# Altium PCB HeartRateBand.PcbDoc
Units mm, origin at the board's own origin, x right, y up, seen from the top; angles counter-clockwise.
Board outline 144.57 x 35.13 mm, 2 copper layers (Top Layer, Bottom Layer); 68 components, 44 nets, 278 pads, 108 vias.
Unrouted connection lines stored in the file: 33.
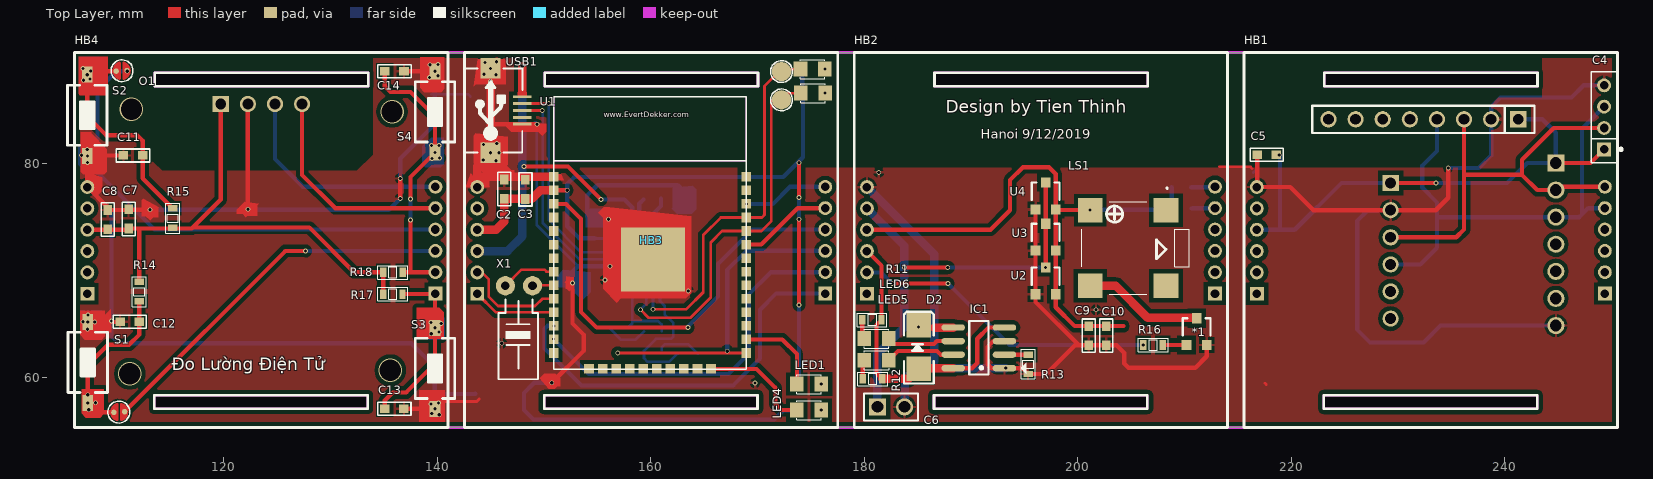
[diagram p0: Top Layer view]
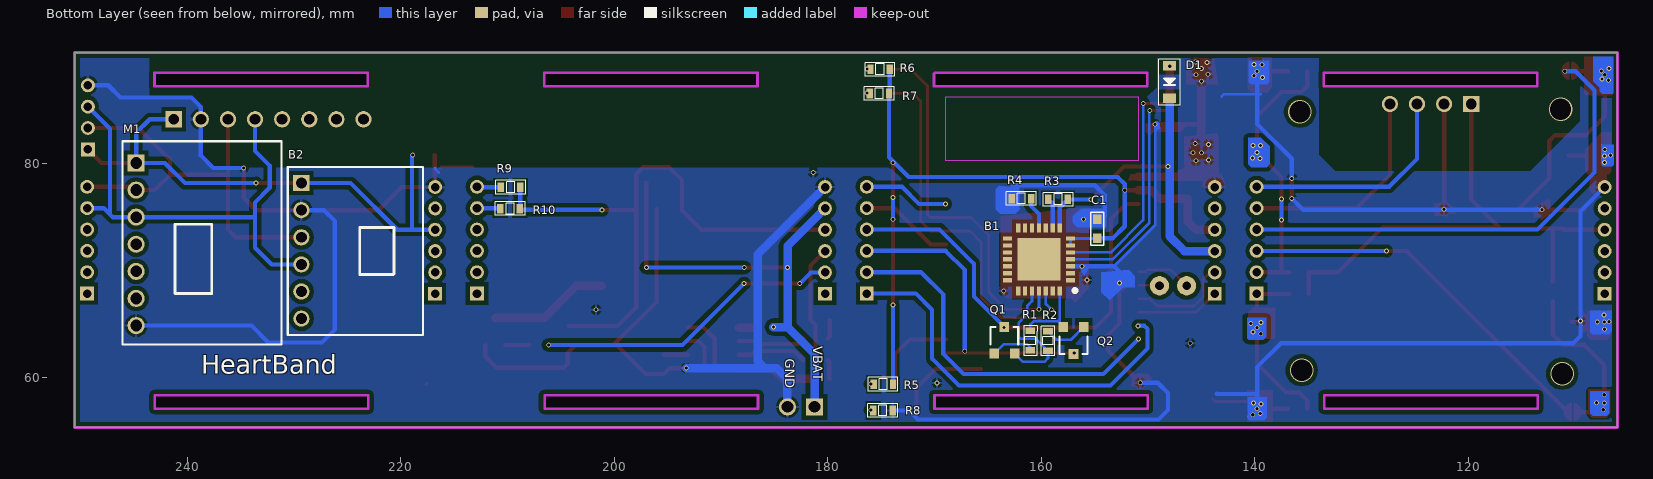
[diagram p1: Bottom Layer view, seen from below]
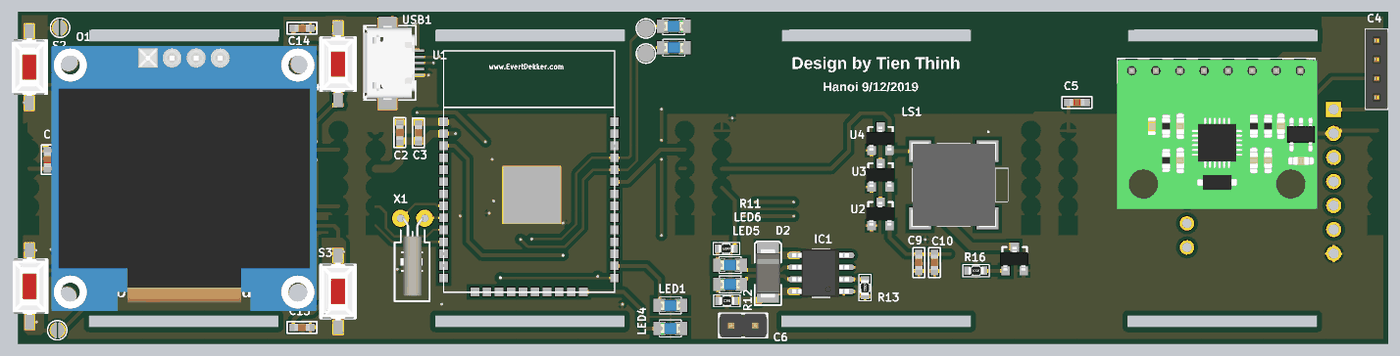
[diagram p2: 3D render of the assembled board from above, using the file's embedded part models]
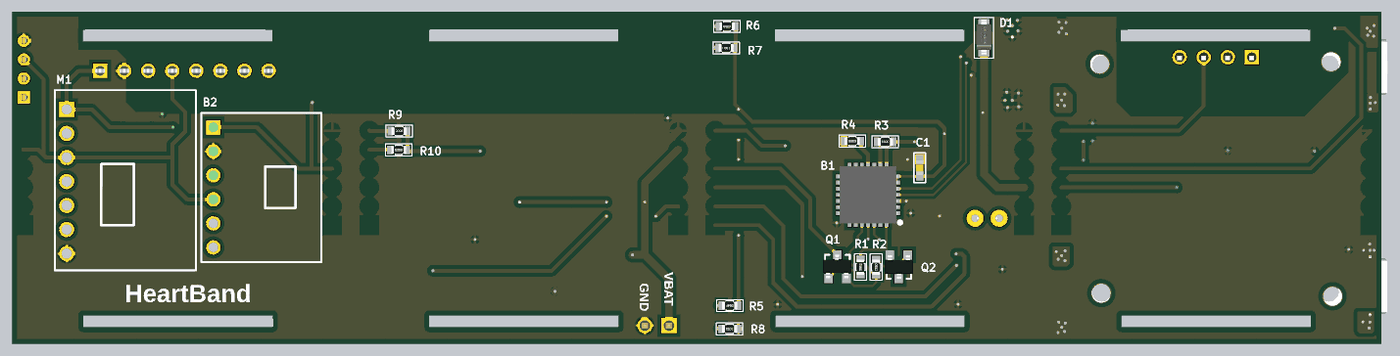
[diagram p3: 3D render of the assembled board from below, using the file's embedded part models]

## Layer stack, top to bottom
Top Solder: solder mask 0.0102, Solder Resist, Dk 3.5
Top Layer: signal copper 0.0356
Dielectric 1: dielectric 0.32, FR-4, Dk 4.8
Bottom Layer: signal copper 0.0356
Bottom Solder: solder mask 0.0102, Solder Resist, Dk 3.5

## Board outline
106.01,55.31 250.56,55.31 250.57,55.32 250.57,90.41 250.54,90.44 106.03,90.44 106,90.41

## Design rules (kind name [scope] priority, off if disabled: settings)
Clearance [All] p1: gap=0.4 ignorepadtopadclearanceinfootprint=FALSE
PolygonConnect [All] p1: connectstyle=Relief reliefconductorwidth=0.254 reliefentries=4 polygonreliefangle="90 Angle" airgapwidth=0.254
RoutingVias [All] p1: holewidth=0.3 width=0.45 viastyle="Through Hole" minholewidth=0.3 minwidth=0.45 maxholewidth=0.3 maxwidth=0.45
SolderMaskExpansion [All] p1: expansion=0.102
Width [All] p1: maxlimit=0.8 minlimit=0.254 preferedwidth=0.4
30 further rules are at their usual default settings.

## Classes and differential pairs
component class HeartRateBand: *1 B1 B2 C1 C2 C3 C4 C5 C6 C7 C8 C9 C10 C11 C12 C13 C14 D1 D2 HB1 HB2 HB4 IC1 LED1 LED4 LED5 LED6 LS1 M1 O1 Q1 Q2 R1 R2 R3 R4 R5 R6 R7 R8 R9 R10 R11 R12 R13 R14 R15 R17 R18 R20 S1 S2 S3 S4 U1 U2 U3 U4 USB1 X1

## Components (designator, comment, footprint, x,y, rotation, side; value= is the part's Value field where it differs from the comment)
*1 "AO3400" SOT23-123 211.14,64.29 r0 top
*TP3 "TP" TP 173.435,87.485 r90 top
*TP4 "TP" TP 173.435,84.835 r90 top
B1 "CP2102N-A01-GQFN28" QFN65P600X600X100-29N-D 160.206,71.066 r0 bottom
B2 "BMP280" BMP280 232.06,63.93 r180 bottom
C1 "104" SM-0603 154.75,73.93 r270 bottom value=103
C2 "104" SM-0603 146.27,77.65 r270 top value=103
C3 "104" SM-0603 148.25,77.62 r270 top value=103
C4 "JP4x1-2.0" J4-C1T 249.32,84.37 r90 top
C5 "104" SM-0603 217.71,80.85 r180 top value=103
C6 "JP2" JP2-D1T 181.23,57.24 r0 top
C7 "106" SM-0603 111.066,74.85 r90 top value=103
C8 "106" SM-0603 109.11,74.79 r90 top value=103
C9 "106" SM-0603 201.04,63.91 r270 top value=103
C10 "106" SM-0603 202.68,63.91 r270 top value=103
C11 "104" SM-0603 111.48,80.8 r0 top value=103
C12 "104" SM-0603 111.17,65.21 r180 top value=103
C13 "104" SM-0603 135.96,57.06 r180 top value=103
C14 "104" SM-0603 135.97,88.69 r180 top value=103
D1 "Diode" DIO-SMD-123 147.97,87.67 r90 bottom
D2 "Diode" DIO-SMD-106 185.11,62.848 r270 top
HB1 "HeartBand" HeartBand 210.45,50.06 r0 top locked
HB2 "HeartBand" HeartBand 173.92,50.06 r0 top locked
HB3 "HeartBand" HeartBand 137.4,50.06 r0 top locked
HB4 "HeartBand" HeartBand 100.87,50.06 r0 top locked
IC1 "TP4056-42-ESOP8" SO-8 190.73,62.77 r180 top
LED1 "LED" SM-LED-0805-Blue 175.97,59.37 r180 top
LED2 "LED" SM-LED-0805-Blue 176.306,88.89 r180 top
LED3 "LED" SM-LED-0805-Blue 176.326,86.64 r180 top
LED4 "LED" SM-LED-0805-Blue 173.684,56.94 r0 top
LED5 "LED" SM-LED-0805-Blue 180,61.61 r0 top
LED6 "LED" SM-LED-0805-Blue 179.99,63.64 r0 top
LS1 "BUZZER MLT-8530" MLT8530 204.72,72.13 r0 top
M1 "Mã SP: 385470" MAX30100 244.8,64.86 r180 bottom
MU1 "MPU6050" MPU6050 235.688,76.695 r180 top locked
O1 "OLED" "OLED I2C MODULE" 120.91,51.128 r0 top locked
Q1 "2N3904" SOT23-231 163.44,63.48 r180 bottom value=C1815
Q2 "2N3904" SOT23-231 156.97,63.46 r0 bottom value=C1815
R1 "12k" RES-SMD-0603 161.01,63.43 r90 bottom
R2 "12k" RES-SMD-0603 159.36,63.42 r270 bottom
R3 "4k7" RES-SMD-0603 158.39,76.68 r0 bottom
R4 "4k7" RES-SMD-0603 161.87,76.76 r180 bottom
R5 "470r" RES-SMD-0603 174.81,59.36 r180 bottom
R6 "470r" RES-SMD-0603 175.1,88.87 r180 bottom
R7 "470r" RES-SMD-0603 175.18,86.6 r180 bottom
R8 "470R" RES-SMD-0603 174.83,56.9 r180 bottom
R9 "10k" RES-SMD-0603 209.71,77.82 r0 bottom
R10 "10k" RES-SMD-0603 209.75,75.82 r0 bottom
R11 "10k" RES-SMD-0603 180.727,65.39 r180 top
R12 "10k" RES-SMD-0603 180.79,59.86 r180 top
R13 "1k2" RES-SMD-0603 195.35,61.25 r270 top
R14 "10k" RES-SMD-0603 112.06,68.03 r90 top
R15 "10k" RES-SMD-0603 115.2,74.91 r90 top
R16 "10k" RES-SMD-0603 207.067,63.04 r180 top
R17 "10k" RES-SMD-0603 135.803,67.81 r0 top
R18 "10k" RES-SMD-0603 135.823,69.85 r0 top
S1 "SW" "BUTTON-SMD 2PIN" 107.23,61.4 r270 top
S2 "SW" "BUTTON-SMD 2PIN" 107.19,84.57 r270 top
S3 "SW" "BUTTON-SMD 2PIN" 139.77,60.85 r270 top
S4 "SW" "BUTTON-SMD 2PIN" 139.77,84.88 r90 top
SB1 "SB" SB#1 108.585,55.145 r0 top
SB2 "SB" SB#2 112.005,90.345 r180 top
U1 "ESP32 MODULE" ESP32S 150.906,60.766 r0 top locked
U2 "XC6206P332MR" SOT23-132 196.992,69.05 r0 top
U3 "XC6206P332MR" SOT23-132 196.992,73.15 r0 top
U4 "XC6206P332MR" SOT23-132 196.992,77 r0 top
USB1 "USB_M" USB-M1 147.95,85.01 r90 top
X1 "32.768" XT32k 148.91,68.59 r270 top value=4Mhz

## Footprints (in the part's own frame and the unit in brackets; to place one, negate y for a bottom-side part, rotate by r counter-clockwise, add the part's x,y. Pads: shape width x height; smd on the part's side, far side on the other; paste and mask are expansions set on the pad)
BMP280 [mm]
  rect 1.52x1.52 hole 1.02: 1(2.74,14.28)
  round 1.52 hole 1.02: 2(2.74,11.74) 3(2.74,9.2) 4(2.74,6.66) 5(2.74,4.12) 6(2.74,1.58)
  silkscreen extent 1.47,0.04 14.13,15.8, body extent 1.45,0.01 14.14,15.81, height 2.6
"BUTTON-SMD 2PIN" [mm] "Switch SMD type"
  rect 1.5x1 smd: 1(-3.8,0) 2(3.8,0)
  silkscreen extent -2.82,-1.85 2.82,1.85, body extent -3.05,-1.85 3.05,1.85, height 2.5
DIO-SMD-106 [mil]
  rect 90x90.55 smd: 1(80,0) 2(-80,0)
  silkscreen extent -130,-55 135,55, body extent -99,-50 106,52, height 95
DIO-SMD-123 [mm]
  rect 0.9x1.2 smd: 1(1.524,0) 2(-1.524,0)
  silkscreen extent -2.16,-1.02 2.16,1.02, body extent -1.76,-0.8 1.94,0.8, height 1.25
ESP32S [mm] "ESP32S-Module"
  rect 0.9x0.9 smd: 1(0,18.034) 2(0,16.764) 3(0,15.494) 4(0,14.224) 5(0,12.954) 6(0,11.684) 7(0,10.414) 8(0,9.144) 9(0,7.874) 10(0,6.604) 11(0,5.334) 12(0,4.064) 13(0,2.794) 14(0,1.524) 15(3.3,0.034) 16(4.57,0.034) 17(5.84,0.034) 18(7.11,0.034) 19(8.38,0.034) 20(9.65,0.034) 21(10.92,0.034) 22(12.19,0.034) 23(13.46,0.034) 24(14.73,0.034) 25(18.034,1.524) 26(18.034,2.794) 27(18.034,4.064) 28(18.034,5.334) 29(18.034,6.604) 30(18.034,7.874) 31(18.034,9.144) 32(18.034,10.414) 33(18.034,11.684) 34(18.034,12.954) 35(18.034,14.224) 36(18.034,15.494) 37(18.034,16.764) 38(18.034,18.034)
  rect 6x6 smd: 101(9.3,10.3)
  Keep-Out Layer region: 0,19.558 18.034,19.558 18.034,25.527 0,25.527
  silkscreen extent 0,0 18.03,25.53, body extent 0,0 18.03,25.53, height 2
HeartBand [mm]
  round 1.3 hole 0.8: 1(6.33,27.78) 2(6.33,25.78) 3(6.33,23.78) 4(6.33,21.78) 5(6.33,19.78) 8(38.94,19.8) 9(38.94,21.8) 10(38.94,23.8) 11(38.94,25.8) 12(38.94,27.8)
  rect 1.3x1.3 hole 0.8: 6(6.33,17.78) 7(38.94,17.8)
  Keep-Out Layer board cut-out: 12.61,8.26 12.61,7.01 32.6,7.01 32.6,8.26
  Keep-Out Layer board cut-out: 12.65,38.48 12.65,37.23 32.64,37.23 32.64,38.48
  Multi-Layer pour cut-out: 12.61,8.26 12.61,7.01 32.6,7.01 32.6,8.26
  Multi-Layer pour cut-out: 12.65,38.48 12.65,37.23 32.64,37.23 32.64,38.48
  silkscreen extent 5.13,5.25 40.12,40.38
J4-C1T [mm] "4p, 1 row, straight, gold plating"
  rect 1.3x1.3 hole 0.8: 1(-3,0)
  round 1.3 hole 0.8: 2(-1,0) 3(1,0) 4(3,0)
  silkscreen extent -4.25,-1.71 4.25,1.2, body extent -4.25,-1.2 4.25,1.2, height 4.31
JP2-D1T [mm] "2 pins, 1 row, straight, gold plating"
  rect 1.6x1.6 hole 1.1: 1(0,0)
  round 1.6 hole 1.1: 2(2.54,0)
  silkscreen extent -1.27,-1.27 3.81,1.27, body extent -1.27,-1.27 3.81,1.27, height 8.54
MAX30100 [mm]
  rect 1.6x1.6 hole 1.1: 1(0,15.24)
  round 1.6 hole 1.1: 2(0,12.7) 3(0,10.16) 4(0,7.62) 5(0,5.08) 6(0,2.54) 7(0,0)
  silkscreen extent -1.27,-1.77 13.63,17.27, body extent -1.27,-1.79 13.63,17.26, height 3
MLT8530 [mm]
  rect 2.3x2.3 smd: 1(3.55,3.55) 2(-3.55,3.55) 3(-3.55,-3.55) 4(3.55,-3.55)
  silkscreen extent -4.35,-4.35 5.72,5.65, body extent -4.47,-4.47 4.47,4.47, height 3.1
MPU6050 [mm]
  rect 1.52x1.52 hole 1.02: 1(-5.588,-7.493)
  round 1.52 hole 1.02: 2(-3.048,-7.493) 3(-0.508,-7.493) 4(2.032,-7.493) 5(4.572,-7.493) 6(7.112,-7.493) 7(9.652,-7.493) 8(12.192,-7.493)
  round 0 all layers, no hole: 2(235.688,76.695) 2(235.688,76.695)
  silkscreen extent -7.11,-8.76 13.71,-6.22, body extent -7.37,-8.76 13.74,7.11, height 14.54
"OLED I2C MODULE" [mm]
  rect 1.52x1.52 hole 1.02: 1(-1.21,34.492)
  round 1.52 hole 1.02: 2(1.33,34.492) 3(3.87,34.492) 4(6.41,34.492)
  body extent -11.38,7.66 16.62,35.66, height 5
QFN65P600X600X100-29N-D [mm]
  rect 0.85x0.4 smd: 1(-2.95,1.95) 2(-2.95,1.3) 3(-2.95,0.65) 4(-2.95,0) 5(-2.95,-0.65) 6(-2.95,-1.3) 7(-2.95,-1.95) 15(2.95,-1.95) 16(2.95,-1.3) 17(2.95,-0.65) 18(2.95,0) 19(2.95,0.65) 20(2.95,1.3) 21(2.95,1.95)
  rect 0.4x0.85 smd: 8(-1.95,-2.95) 9(-1.3,-2.95) 10(-0.65,-2.95) 11(0,-2.95) 12(0.65,-2.95) 13(1.3,-2.95) 14(1.95,-2.95) 22(1.95,2.95) 23(1.3,2.95) 24(0.65,2.95) 25(0,2.95) 26(-0.65,2.95) 27(-1.3,2.95) 28(-1.95,2.95)
  rect 4x4 smd: 29(0,0)
  silkscreen extent -3.54,2.76 -3.21,3.09, body extent -3.05,-3.05 3.05,3.05, height 1
RES-SMD-0603 [mm]
  rect 0.6x0.9 smd: 1(-0.889,0) 2(0.927,0)
  silkscreen extent -1.4,-0.64 1.4,0.64, body extent -0.8,-0.4 0.8,0.4, height 0.43
SB#1 [mm]
  round 0.5 smd: 1(1.095,1.585) 2(2.105,1.645)
  Top Layer region: 0.865,1.611 0.93,1.919 1.114,2.174 1.385,2.334 1.385,2.334 1.388,0.878 1.114,1.04 0.929,1.3 0.865,1.611
  Top Layer region: 2.321,1.612 2.256,1.92 2.072,2.176 1.8,2.335 1.8,2.335 1.803,0.879 2.075,1.042 2.258,1.301 2.321,1.612
  Top Layer lines w0.254: 0.865,1.611 cw(c1.627,1.611) 1.385,2.334 1.386,1.586 1.388,0.878 cw(c1.629,1.601) 0.867,1.585 cw(c1.629,1.601) 0.867,1.601 ; 2.321,1.612 ccw(c1.559,1.612) 2.289,1.829 ccw(c1.559,1.612) 1.8,2.335 1.802,1.644 1.803,0.879 ccw(c1.561,1.602) 2.323,1.602
  silkscreen extent 0.54,0.58 2.58,2.63
SB#2 [mm]
  round 0.5 smd: 1(1.095,1.585) 2(2.105,1.645)
  Top Layer region: 0.865,1.611 0.93,1.919 1.114,2.174 1.385,2.334 1.385,2.334 1.388,0.878 1.114,1.04 0.929,1.3 0.865,1.611
  Top Layer region: 2.321,1.612 2.256,1.92 2.072,2.176 1.8,2.335 1.8,2.335 1.803,0.879 2.075,1.042 2.258,1.301 2.321,1.612
  Top Layer lines w0.254: 2.323,1.602 cw(c1.561,1.602) 1.803,0.879 ; 2.321,1.612 ccw(c1.559,1.612) 2.32,1.645 ccw(c1.559,1.612) 1.8,2.335 1.802,1.644 1.803,0.879 ; 0.867,1.601 ccw(c1.629,1.601) 1.388,0.878 1.386,1.586 ; 0.865,1.611 cw(c1.627,1.611) 1.385,2.334 1.386,1.666 1.386,1.586 ; 1.803,0.879 1.803,0.879 ; 1.386,1.586 1.386,1.586
  silkscreen extent 0.54,0.58 2.58,2.63
SM-0603 [mm]
  rect 0.9x0.8 smd: 1(-0.9,0) 2(0.9,0)
  silkscreen extent -1.56,-0.61 1.56,0.61, body extent -0.81,-0.4 0.79,0.4, height 0.5
SM-LED-0805-Blue [mil]
  rect 50x55 smd: 1(0,0) 2(90,0)
  silkscreen extent 0,-35 90,35, body extent 5,-25 85,25, height 43
SO-8 [mm] "8-Pin Small Outline Integrated Circuit 1.27 mm Pitch, IPC Medium Density"
  oval 2.2x0.6 smd: 1(-2.4,1.905) 2(-2.4,0.635) 3(-2.4,-0.635) 4(-2.4,-1.905) 5(2.4,-1.905) 6(2.4,-0.635) 7(2.4,0.635) 8(2.4,1.905)
  silkscreen extent -4.44,-2.5 0.9,2.5, body extent -2.93,-2.51 3.08,2.49, height 1.75
SOT23-123 [mm] "SOT23, 1=bottom-left, 2=top, 3=bottom-right"
  rect 0.9x0.95 smd: 1(-0.95,-1.25) 2(0,1.25)
  rect 0.9x0.95 smd mask+0: 3(0.95,-1.25)
  silkscreen extent -1.3,-0.38 1.3,1.25, body extent -1.52,-1.23 1.48,1.27, height 1.06
SOT23-132 [mm]
  rect 0.9x0.95 smd: 1(-0.95,-1.25) 3(0,1.25)
  rect 0.9x0.95 smd mask+0: 2(0.95,-1.25)
  silkscreen extent -1.3,-0.38 1.3,1.25, body extent -1.52,-1.23 1.48,1.27, height 1.06
SOT23-231 [mm]
  rect 0.9x0.95 smd mask+0: 1(0.95,-1.25)
  rect 0.9x0.95 smd: 2(-0.95,-1.25) 3(0,1.25)
  silkscreen extent -1.3,-0.38 1.3,1.25, body extent -1.52,-1.23 1.48,1.27, height 1.06
TP [mm]
  round 1.8 smd: 1(1.175,1.195)
  silkscreen extent 0.15,0.17 2.2,2.21
USB-M1 [mil]
  rect 10x70 smd: 1(51.18,0) 2(25.59,0) 3(0,0) 4(-25.59,0) 5(-50,0)
  rect 74.8x74.8 smd: 5(-155.51,116.84) 5(155.51,116.84)
  silkscreen extent -155,-1 155,215, body extent -157,5 158,218, height 107
XT32k [mm]
  round 1.8 hole 0.813: 1(0,0) 2(0,-2.54)
  silkscreen extent 1.27,-3.17 8.76,0.51, body extent -0.15,-2.42 8.2,-0.12, height 1.95

## Part data
B1: "SILICON LABS - CP2102N-A01-GQFN28 - USB-UART INTERFACE BRIDGE, QFN-28", Manufacturer_Name="Silicon Labs", Arrow Part Number=CP2102N-A01-GQFN28, Arrow Price/Stock=https://www.arrow.com/en/products/cp2102n-a01-gqfn28/silicon-labs, Datasheet Link=http://www.farnell.com/datasheets/2245279.pdf, Geometry.Height=0.8mm, Manufacturer_Part_Number=CP2102N-A01-GQFN28
B2: "https://iotmaker.vn/cam-bien-ap-suat-bmp280.html"
C1 C2 C3 C5 C7 C8 C9 C10 C11 C12 C13 C14: library part CM, "Cap SMD"
C4: "WR-PHD 2.00 mm Socket Header", Manufacturer="W¨¹rth Elektronik eiSos GmbH", partNo=62000411821, ComponentLink1 Description=Manufacturer, ComponentLink1URL=http://www.we-online.com, ComponentLink2 Description=Datasheet, ComponentLink2URL=http://katalog.we-online.de/em/datasheet/6200xx11821.pdf, Created by="Karrer Zheng", Created Date="2 April 2013", NoPins=04
C6: "WR-PHD 2.54 mm Angled Socket Header", Manufacturer="W¨¹rth Elektronik eiSos GmbH", partNo=613002143121, ComponentLink1 Description=Manufacturer, ComponentLink1URL=http://www.we-online.com, ComponentLink2 Description=Datasheet, ComponentLink2URL=http://katalog.we-online.de/em/datasheet/6130xx143121.pdf, Created by="Karrer Zheng", Created Date="29 March 2013", NoPins=02
IC1: "Integrated Circuit", Manufacturer_Name="Nanjing Extension Microelectronics", Datasheet Link=https://datasheet.lcsc.com/szlcsc/1906261508_Nanjing-Extension-Microelectronics-TP4056-42-ESOP8_C16581.pdf, Height=1.75mm, Manufacturer_Part_Number=TP4056-42-ESOP8
LS1: "Loudspeaker or Buzzer", Manufacturer_Name="Jiangsu Huaneng Elec", Manufacturer_Part_Number=MLT-8530, Datasheet Link=https://datasheet.lcsc.com/szlcsc/1811182003_Jiangsu-Huaneng-Elec-MLT-8530_C94599.pdf, Height=3mm
M1: library part MAX30100_HeartRateSensor, "http://linhkienviet.vn/cam-bien-nhip-tim-va-oxy-trong-mau-max30100-max30100-pulse-oximeter-and-heart-rate"
MU1: Manufacturer="W¨¹rth Elektronik eiSos GmbH", partNo=613004143121, ComponentLink1 Description=Manufacturer, ComponentLink1URL=http://www.we-online.com, ComponentLink2 Description=Datasheet, ComponentLink2URL=http://katalog.we-online.de/em/datasheet/6130xx143121.pdf, Created by="Karrer Zheng", Created Date="29 March 2013", NoPins=04
O1: library part "OLED I2C MODULE"
Q1 Q2: "NPN 600mW, ECB", =C2383
R1 R2 R3 R4 R5 R6 R7 R8 R9 R10 R11 R12 R13 R14 R15 R16 R17 R18: library part R, "Resistor R1/4W"
S1 S2 S3 S4: library part SW-Button, "Switch-Button", LatestRevisionDate=17-Jul-2002, LatestRevisionNote="Re-released for DXP Platform.", PackageReference=SPST-2, Published=24-Mar-1999, Publisher="Altium Limited"
U2 U3 U4: "3V3/0.5A"
X1: library part XT2, "Crystal, 32.768 KHz, -40 to 85 degC, 3.2 x 1.5 x 0.9 mm SMD"

## Via types
v1: diameter 0.45, hole 0.3, Top Layer to Bottom Layer, tented both sides, 104 vias
v2: diameter 2.2, hole 2, Top Layer to Bottom Layer, tented both sides, 4 vias

## Nets (pads, with @x,y where several pads share a name; then routed paths per layer and width w, separated by ;. In a path a pad name is that pad's centre, name@x,y a point inside that pad or via, vN(x,y) a via of type N, cw(c..) or ccw(c..) an arc to the next point about the centre after c; other vN are vias at no path point)
3V3: B1.6 B1.7 B2.1 C1.2 C2.2 C3.2 C4.1 C5.1 C7.1 C8.1 C9.1 C10.1 HB1.3 HB2.3 HB3.3 HB4.3 LS1.2 M1.1 MU1.1 O1.1 R5.2 R6.2 R7.2 R9.1 R10.1 R14.2 R15.1 R17.1 R18.1 U1.2 U2.2 U3.2 U4.2 | length 227
  Top Layer w0.4: HB4.3 C7.1@111.066,73.84 ; C7.1 112.02,73.95 ; R14.2 112.06,73.91 112.02,73.95 ; O1.1 119.7,76.67 117.07,74.04 ; R17.1 R18.1@134.914,69.85 ; R18.1 R18.1@134.914,69.85 ; U1.2 150.916,77.54 v1(152.16,77.54) ; v1(173.883,66.79) v1(173.883,74.813) ; v1(173.883,76.857) v1(173.883,80.123) ; HB2.3 191.82,73.84 193.65,75.67 193.65,78.49 194.86,79.7 197.3,79.7 197.942,79.058 U4.2 ; v1(201.15,75.7) LS1.2 198.012,75.68 U4.2 ; 204.28,64.81 199.71,64.81 197.942,66.578 U2.2 U4.2 ; B2.1 v1(233.58,78.21) ; M1.1 248.05,80.1 C4.1 ; 112.02,73.95 116.98,73.95 117.07,74.04 ; 117.07,74.04 128,74.04 132.19,69.85 R18.1@134.914,69.85
  Top Layer w0.8: HB3.3 145.5,73.84 146.27,74.61 C2.2 148.85,76.75 149.63,77.53 U1.2
  Bottom Layer w0.254: C1.2 154.764,73.016 B1.7 B1.6
  Bottom Layer w0.4: C1.2 153.3,73.03 152.16,74.17 v1(152.16,77.54) 152.16,78.12 152.83,78.79 172.41,78.79 174.253,80.633 R7.2 174.173,86.68 R6.2 ; R5.2 v1(173.883,66.79) ; v1(173.883,74.813) v1(173.883,76.857) ; v1(201.15,75.7) 208.741,75.7 R10.1 208.821,75.86 R9.1 ; HB1.3 218.95,73.84 ; v1(218.88,80.83) 218.95,80.76 218.95,73.84 ; B2.1 224.71,78.21 220.34,73.84 218.95,73.84 ; v1(233.58,78.21) 240.23,78.21 242.12,80.1 M1.1 244.8,82.92 243.532,84.188 MU1.1
5V: B1.8 D1.2 D2.1 HB1.4 HB2.4 HB3.4 HB4.4 IC1.4 IC1.8 R3.1 R11.1 R12.1 | length 58.9
  Top Layer w0.4: v1(148.11,79.76) 152.24,79.76 v1(155.32,76.68) ; HB2.4 181.616,70.474 R11.1 181.15,64.924 181.15,60.389 R12.1 ; IC1.8 190.085,60.865 190.58,61.36 190.58,63.62 191.635,64.675 IC1.4
  Top Layer w0.8: R12.1 184.154,59.86 D2.1@185.002,60.708 ; D2.1@185.159,60.865 IC1.8
  Bottom Layer w0.4: v1(155.32,76.68) R3.1 158.256,75.925 B1.8
  Bottom Layer w0.8: HB3.4 146.58,71.84 147.97,73.23 D1.2
A: HB1.5 HB2.5 HB3.5 HB4.5 R16.2 U1.10 | length 38.4
  Top Layer w0.254: HB3.5 144.16,69.84 144.82,69.18 144.82,67.55 145.68,66.69 149.15,66.69 149.83,67.37 U1.10
  Top Layer w0.4: v1(182.61,68.81) v1(187.83,68.81)
  Bottom Layer w0.4: HB2.5 181.58,69.84 v1(182.61,68.81) ; v1(187.83,68.81) 193.6,63.04 v1(206.14,63.04)
B: HB1.6 HB2.6 HB3.6 HB4.6 U1.11 | length 7.9
  Top Layer w0.254: HB3.6 145.47,66.1 U1.11
BUZZER: U1.27
C: C13.2 HB1.7 HB2.7 HB3.7 HB4.7 R17.2 S3.1 U1.12 | length 55.3
  Top Layer w0.4: C13.2 135.06,57.83 135.82,58.59 137.07,58.59 139.77,61.29 S3.1@139.77,64.44 ; R17.2 139.37,67.81 139.77,67.41 S3.1@139.77,64.79 ; v1(139.41,65.15) S3.1@139.77,64.79 ; v1(139.43,64.1) S3.1@139.77,64.44 ; v1(140.15,64.26) S3.1@139.77,64.64 ; v1(140.36,65.06) 139.95,64.65 v1(139.77,64.65) ; S3.1@139.77,64.44 S3.1@139.77,64.64 ; S3.1@139.77,64.64 v1(139.77,64.65) ; v1(139.77,64.65) S3.1@139.77,64.79
  Bottom Layer w0.4: v1(150.92,64.83) 150.31,64.83 150.04,64.56 150.04,62.71 153.5,59.25 167.71,59.25 170.22,61.76 170.22,66.34 171.74,67.86 HB3.7
D: C14.2 HB1.8 HB2.8 HB3.8 HB4.8 R18.2 S4.1 U1.13 | length 62.6
  Top Layer w0.4: C14.2 135.07,87.28 135.6,86.75 137.48,86.75 139.77,84.46 S4.1@139.77,81.33 ; R18.2 137.65,69.85 ; v1(137.48,74.75) 137.48,70.02 137.65,69.85 ; v1(137.48,76.71) 137.48,78.79 v1(139.77,81.08) ; v1(139.45,81.73) 139.45,81.4 v1(139.77,81.08) ; v1(139.48,80.5) 139.77,80.79 S4.1@139.77,80.99 ; HB4.8 139.8,69.85 137.65,69.85 ; v1(140.16,81.72) S4.1@139.77,81.33 ; v1(140.19,80.57) S4.1@139.77,80.99 ; S4.1@139.77,80.99 v1(139.77,81.08) ; v1(139.77,81.08) S4.1@139.77,81.33
  Bottom Layer w0.4: v1(137.48,74.75) v1(137.48,76.71) ; v1(150.88,63.61) 154.17,60.32 167.28,60.32 169.16,62.2 169.16,67.76 171.26,69.86 HB3.8
DTR: B1.28 Q2.1 R1.2 | length 7
  Bottom Layer w0.254: Q2.1 158.256,65.046 158.256,65.29 ; B1.28 158.256,65.29 ; R1.2 161.01,64.95 160.67,65.29 158.256,65.29
E: U1.14
EN: HB1.10 HB2.10 HB3.10 HB4.10 Q1.3 SB2.1 U1.3 | length 86.5
  Top Layer w0.4: U1.3 152.06,76.26 153.46,74.86 153.46,66.14 154.92,64.68 v1(163.49,64.68) ; HB3.10@175.89,73.86 HB3.10
  Bottom Layer w0.4: v1(110.94,88.68) 109.91,88.68 108.14,86.91 108.14,79.21 113.49,73.86 HB4.10 ; Q1.3 166.3,67.59 166.3,70.64 169.52,73.86 HB3.10
ESP_RX: *TP4.1 B1.26 LED3.2 U1.34 | length 35.6
  Top Layer w0.254: v1(159.03,66.35) 159.79,65.59 163.71,65.59 165.61,67.49 165.61,72.66 166.67,73.72 U1.34 170.35,73.72 171.29,74.66 171.29,85.9 172.03,86.64 LED3.2
  Bottom Layer w0.254: v1(159.03,66.35) 159.556,66.876 B1.26
ESP_TX: *TP3.1 B1.25 LED2.2 U1.35 | length 35.1
  Top Layer w0.254: v1(160.206,66.396) 163.326,66.396 164.91,67.98 164.91,73.34 166.56,74.99 U1.35 170.4,74.99 170.65,75.24 170.65,87.3 172.24,88.89 LED2.2
  Bottom Layer w0.254: v1(160.206,66.396) B1.25
GND: *1.3 B1.3 B2.2 C1.1 C2.1 C3.1 C4.4 C5.2 C6.2 C7.2 C8.2 C9.2 C10.2 C11.1 C12.2 C13.1 C14.1 HB1.1 HB2.1 HB3.1 HB4.1 IC1.1 IC1.3 M1.7 MU1.2 O1.2 R4.1 R8.2 R13.2 S1.1 S2.2 S3.2 S4.2 U1.1 U1.101 U2.1 U3.1 U4.1 USB1.5 | length 415.9
  Top Layer w0.254: 140.553,57.737 143.687,57.737 143.92,57.97 ; 213.26,79.73 216.18,79.73 216.33,79.58 ; 217.554,59.45 217.674,59.33
  Top Layer w0.4: v1(106.66,80.82) 106.71,80.77 S2.2 ; v1(106.78,65.21) 106.79,65.2 v1(107.23,65.2) ; v1(107.18,81.36) 107.19,81.35 S2.2 ; v1(107.21,64.52) 107.23,64.54 v1(107.23,65.2) ; v1(107.25,65.86) 107.23,65.84 v1(107.23,65.2) ; C12.2 110.26,65.2 v1(107.9,65.2) v1(107.23,65.2) ; C11.1 107.22,80.8 S2.2 ; v1(113.08,75.71) 111.106,75.71 C7.2 111.006,75.69 C8.2 109.11,75.93 HB4.1 v1(107.2,80.13) ; v1(122.24,75.75) O1.2 ; v1(136.51,76.77) v1(136.51,78.65) ; C13.1 v1(139.76,57.06) S3.2 ; C14.1 v1(139.76,88.69) ; v1(139.27,88.11) S4.2@139.77,88.61 ; v1(139.31,89.29) 139.31,89.14 v1(139.76,88.69) ; v1(139.39,57.51) S3.2@139.77,57.13 ; v1(139.47,56.62) S3.2@139.77,56.92 ; v1(140.06,88.26) 139.77,88.55 S4.2@139.77,88.61 ; v1(140.06,89.33) 139.77,89.04 S4.2 ; v1(140.09,57.61) 139.77,57.29 S3.2@139.77,57.13 ; v1(140.17,56.5) 139.77,56.9 S3.2@139.77,56.92 ; 144.982,83.83 145.082,83.73 v1(149.32,83.73) ; v1(150.71,59.5) 153.7,62.49 153.7,64.01 152.65,65.06 v1(152.65,68.84) ; v1(156.04,74.83) 159.804,71.066 U1.101 159.556,70.416 v1(156.18,70.416) ; IC1.1 191.915,60.865 191.54,61.24 191.54,62.84 192.105,63.405 IC1.3 ; IC1.1@193.26,60.865 194.808,60.865 R13.2 197.053,60.323 199.74,63.01 200.11,63.01 ; U4.1 U3.1 U2.1 196.042,67.078 200.11,63.01 ; *1.3 212.09,61.98 211.02,60.91 204.76,60.91 204.36,61.31 204.36,62.29 203.64,63.01 C10.2 C9.2 200.11,63.01 ; C5.2 216.81,77.87 HB1.1 219.91,77.84 222.08,75.67 B2.2 233.54,75.67 234.71,76.84 v1(234.71,79.63) ; S2.2 107.19,80.14 v1(107.2,80.13) ; S2.2 v1(107.2,80.76) v1(107.2,80.13) ; v1(139.76,88.69) S4.2 ; S3.2@139.77,56.92 S3.2 ; S3.2 S3.2@139.77,57.13 ; S4.2@139.77,88.61 S4.2
  Top Layer w0.8: HB3.1 143.73,78.78 ; v1(144.32,81.83) USB1.5@144.982,81.168 ; v1(145.49,80.3) 144.982,80.808 v1(144.982,81.06) ; v1(145.54,89.57) USB1.5@145.49,89.52 ; v1(145.56,81.92) USB1.5@144.982,81.342 ; v1(145.76,81.06) v1(144.982,81.06) ; U1.1 143.75,78.8 143.73,78.78 ; 143.73,78.78 143.73,79.807 v1(144.304,80.382) v1(144.982,81.06) ; v1(144.982,81.06) USB1.5@144.982,81.168 ; USB1.5@144.982,81.168 USB1.5@144.982,81.342 ; USB1.5@144.982,81.342 144.982,83.83 v1(144.982,87.756) ; v1(144.982,87.756) USB1.5@144.982,88.4 ; v1(144.982,87.756) 145.49,88.264 v1(145.49,88.37) 145.47,88.35 145.46,88.35 145.41,88.4 USB1.5@144.982,88.4 ; USB1.5@144.982,88.4 v1(144.37,88.4) 144.45,88.48 v1(144.45,89.52) USB1.5@145.49,89.52 ; USB1.5@144.982,88.4 v1(144.982,88.96) 144.982,89.012 USB1.5@145.49,89.52
  Bottom Layer w0.254: 139.45,86.54 139.76,86.54 142.87,86.54 143.08,86.33 ; v1(149.32,83.73) 149.32,74.26 153.164,70.416 ; 216.45,79.21 216.8,79.56
  Bottom Layer w0.4: HB4.1 109.47,75.57 v1(109.47,65.29) 109.47,63.87 110.15,63.19 137.55,63.19 139.76,60.98 139.76,58.44 ; v1(113.08,75.71) 135.45,75.71 v1(136.51,76.77) ; v1(136.51,78.65) 136.51,80.5 139.76,83.75 139.76,86.54 v1(139.76,88.69) ; v1(139.76,57.06) 139.76,58.44 ; 143.55,58.48 143.51,58.44 139.76,58.44 ; v1(150.71,59.5) 149.08,59.5 148.12,58.54 148.12,56.94 149.01,56.05 171.553,56.05 172.403,56.9 R8.2 ; v1(152.65,68.84) 152.65,69.902 153.164,70.416 v1(156.18,70.416) B1.3 ; v1(156.04,74.83) C1.1 154.05,75.53 154.05,77.09 154.97,78.01 162.53,78.01 162.759,77.781 R4.1 ; B2.2 227.19,75.67 226.18,74.66 226.18,64.49 227.39,63.28 232.42,63.28 234,64.86 M1.7 ; v1(234.71,79.63) 237.58,79.63 238.736,80.786 238.736,84.188 238.736,85.336 239.62,86.22 246.27,86.22 247.42,87.37 C4.4
  Bottom Layer w0.8: HB2.1 186.57,71.52 186.57,61.53 185.91,60.87 ; C6.2 183.77,59.85 184.79,60.87 185.91,60.87 ; v1(193.26,60.87) 185.91,60.87
  other v1: 169.76,59.49 146.03,63.2 201.7,66.34 163.51,68.1 155.71,69.13 181.35,79.2
I2C_SCL: B2.3 C4.2 HB1.12 HB2.12 HB3.12 HB4.12 M1.2 MU1.3 O1.3 R9.2 U1.36 | length 73.3
  Top Layer w0.4: U1.36 v1(168.95,76.25) ; B2.3 235.47,73.13 236.196,73.856 236.196,78.96 ; MU1.3 236.196,78.96 ; C4.2 244.61,83.37 241.63,80.39 241.63,78.98 ; HB1.12 245.1,77.86 M1.2 243.05,77.56 241.63,78.98 ; 236.196,78.96 236.216,78.98 241.63,78.98
  Bottom Layer w0.4: O1.3 124.78,80.47 127.39,77.86 HB4.12 ; v1(168.95,76.25) 171.43,76.25 173.04,77.86 HB3.12 ; R9.2 212.82,77.82 HB2.12
I2C_SDA: B2.4 C4.3 HB1.11 HB2.11 HB3.11 HB4.11 M1.3 MU1.4 O1.4 R10.2 U1.33 | length 76.7
  Top Layer w0.4: O1.4 127.32,78.96 130.42,75.86 HB4.11 ; U1.33 170.35,72.45 173.76,75.86 HB3.11
  Bottom Layer w0.4: R10.2 210.717,75.86 HB2.11 ; B2.4 232.1,70.59 233.656,72.146 233.656,74.926 ; MU1.4 233.656,81.21 232.29,79.844 232.29,77.766 233.656,76.4 233.656,74.926 ; C4.3 247.25,83.3 247.25,75.28 ; HB1.11 247.83,75.86 247.25,75.28 ; 233.656,74.926 233.75,75.02 M1.3 246.99,75.02 247.25,75.28
IO0: HB1.9 HB2.9 HB3.9 HB4.9 Q2.3 SB1.2 U1.25 | length 64.9
  Top Layer w0.254: v1(156.9,62.29) U1.25
  Top Layer w0.4: SB1.2 110.874,56.974 125.75,71.85 v1(127.63,71.85)
  Bottom Layer w0.4: v1(127.63,71.85) 139.8,71.85 HB4.9 ; v1(167.15,62.45) 167.15,70.06 168.95,71.86 HB3.9
IO2: LED4.1 U1.24 | length 10.5
  Top Layer w0.4: U1.24 169.9,60.8 171.68,59.02 171.68,57.48 172.22,56.94 LED4.1
IO13: U1.16
IO15: U1.23
Net*1_1: *1.1 R16.1 | length 2.3
  Top Layer w0.4: R16.1@207.996,63 R16.1 *1.1
Net*1_2: *1.2 LS1.3 | length 11.2
  Top Layer w0.8: LS1.3 203.57,68.58 206.55,65.6 211.08,65.6 *1.2
NetB1_4: B1.4 USB1.3 | length 21.2
  Top Layer w0.254: USB1.3 v1(149.83,85.01)
  Bottom Layer w0.254: v1(149.83,85.01) 149.872,84.968 149.872,74.488 153.294,71.066 B1.4
NetB1_5: B1.5 USB1.2 | length 21.5
  Top Layer w0.254: USB1.2 150.42,85.66 v1(150.43,85.67)
  Bottom Layer w0.254: v1(150.43,85.67) 150.442,85.658 150.442,74.738 153.464,71.716 B1.5
NetB1_9: B1.9 R3.2 | length 2.8
  Bottom Layer w0.4: B1.9 158.906,76.269 R3.2
NetB1_11: B1.11 R4.2 | length 3
  Bottom Layer w0.4: B1.11 160.206,75.316 160.943,76.053 R4.2
NetC11_2: C11.2 R15.2 S2.1 SB2.2 | length 22.2
  Top Layer w0.4: v1(106.79,88.96) 107.19,88.56 v1(107.19,88.37) ; v1(106.83,87.85) S2.1@107.19,88.21 ; v1(107.46,87.95) 107.46,88.1 v1(107.19,88.37) ; SB2.2 109.685,88.7 v1(107.52,88.7) v1(107.19,88.37) ; R15.2 112.38,78.657 C11.2 112.38,82.18 111.86,82.7 108.94,82.7 107.19,84.45 S2.1@107.19,88.21 ; S2.1@107.19,88.21 v1(107.19,88.37)
NetC12_1: C12.1 R14.1 S1.2 SB1.1 | length 16.9
  Top Layer w0.4: v1(107.32,56.974) 107.23,57.064 v1(107.23,57.6) ; v1(107.97,57.62) 107.95,57.6 v1(107.23,57.6) ; SB1.1 109.452,56.73 108.1,56.73 v1(107.23,57.6) ; R14.1 112.06,64.96 112.07,64.95 112.07,64.02 111.11,63.06 109.14,63.06 107.23,61.15 v1(107.23,58.38) v1(107.23,57.6)
NetD1_1: D1.1 USB1.1 | length 2.9
  Top Layer w0.254: USB1.1 147.95,86.66
  Top Layer w0.8: 147.95,86.66 v1(147.95,89.16)
NetIC1_2: IC1.2 R13.1 | length 2.2
  Top Layer w0.4: IC1.2 195.346,62.135 R13.1
NetIC1_6: IC1.6 LED6.2 | length 6.4
  Top Layer w0.4: LED6.2 182.776,63.14 186.52,63.14 186.785,63.405 IC1.6
NetIC1_7: IC1.7 LED5.2 | length 6.5
  Top Layer w0.4: LED5.2 183.156,62.48 186.81,62.48 187.155,62.135 IC1.7
NetLED1_1: LED1.1 R5.1
  other v1: 175.97,59.37
NetLED2_1: LED2.1 R6.1
  other v1: 176.306,88.89
NetLED3_1: LED3.1 R7.1
  other v1: 176.326,86.64
NetLED4_2: LED4.2 R8.1
  other v1: 175.97,56.94
NetLED5_1: LED5.1 R12.2 | length 1.8
  Top Layer w0.4: R12.2 179.863,61.473 LED5.1
NetLED6_1: LED6.1 R11.2 | length 1.8
  Top Layer w0.4: R11.2 179.8,63.83 LED6.1
NetQ1_2: Q1.2 R1.1 | length 4.1
  Bottom Layer w0.254: R1.1 161.01,62.79 161.34,63.12 163.5,63.12 Q1.2
NetQ2_2: Q2.2 R2.1 | length 4.2
  Bottom Layer w0.254: Q2.2 157.2,63.53 158.581,63.53 R2.1
NetU1_8: U1.8 X1.2 | length 5.2
  Top Layer w0.254: X1.2 147.88,70.1 150.04,70.1 150.23,69.91 U1.8
NetU1_9: U1.9 X1.1 | length 2
  Top Layer w0.254: X1.1 148.96,68.64 U1.9
RTS: B1.24 Q1.1 R2.2 | length 12.4
  Bottom Layer w0.254: B1.24 160.856,67.15 161.29,66.716 161.29,65.9 162.11,65.08 162.11,63.84 161.89,63.62 160.487,63.62 R2.2 159.36,61.8 159.7,61.46 161.72,61.46 Q1.1
STATUS_ESP: LED1.2 U1.26 | length 8.1
  Top Layer w0.4: U1.26 172.31,63.56 173.684,62.186 LED1.2
VBAT: C6.1 D2.2 HB1.2 HB2.2 HB3.2 HB4.2 IC1.5 U2.3 U3.3 U4.3 | length 45.4
  Top Layer w0.4: v1(183.77,70.3) v1(187.82,70.3) ; v1(196.992,70.3) U4.3
  Top Layer w0.8: 186.555,64.675 IC1.5
  Bottom Layer w0.4: v1(187.82,70.3) v1(196.992,70.3)
  Bottom Layer w0.8: HB2.2 183.76,72.329 183.76,64.72 ; C6.1 181.23,62.19 183.76,64.72 ; v1(185.08,64.72) 183.76,64.72
pads on no net: B1.1 B1.2 B1.10 B1.12 B1.13 B1.14 B1.15 B1.16 B1.17 B1.18 B1.19 B1.20 B1.21 B1.22 B1.23 B1.27 B1.29 B2.5 B2.6 LS1.1 LS1.4 M1.4 M1.5 M1.6 MU1.5 MU1.6 MU1.7 MU1.8 U1.4 U1.5 U1.6 U1.7 U1.15 U1.17 U1.18 U1.19 U1.20 U1.21 U1.22 U1.28 U1.29 U1.30 U1.31 U1.32 U1.37 U1.38 USB1.4
copper on no net:
  other v2: 111.18,60.348 135.59,60.678 135.75,84.898 111.33,85.128

## Polygon pours and split planes (outlines as drawn)
GND on Top Layer "Top Layer-GND" (solid, remove dead copper, pour order 18): 106.03,90.44 106.01,90.42 106.01,55.31 250.56,55.31 250.57,55.32 250.57,90.41 243.7,90.41 243.61,90.5 243.54,90.43 243.54,86.2 239.42,86.2 238.736,85.516 238.736,80.826 237.54,79.63 151.27,79.63 150.18,80.72 150.18,85.59 149.24,86.53 149.24,90.44 134.01,90.44 133.99,90.46 133.99,80.88 132.46,79.35 114.21,79.35 112.55,81.01 112.55,90.48 107.13,90.48 107.09,90.44
GND on Bottom Layer "Bottom Layer-GND" (solid, remove dead copper, pour order 20): 106.03,90.44 106,90.41 106,55.32 250.57,55.32 250.54,55.35 250.54,90.44 243.56,90.44 243.51,90.39 243.59,90.31 243.59,86.11 239.51,86.11 238.736,85.336 238.736,80.786 237.58,79.63 151.17,79.63 150.4,80.4 150.442,80.442 150.442,85.878 149.14,87.18 149.14,90.44 134.36,90.44 133.99,90.07 133.99,80.88 133.98,80.88 132.44,79.34 114.18,79.34 109.5,84.02 109.5,90.48

## Keep-outs
Keep-Out Layer:
  lines w0.254: 106,55.32 106,90.41 106.03,90.44 250.54,90.44 250.57,90.41 250.57,55.32 250.56,55.31 106.01,55.31 ; 170,58.32 150.01,58.32 150.01,57.07 170,57.07 170,58.32 ; 170,58.32 170,58.32 ; 186.53,58.32 186.53,58.32 ; 186.53,58.32 206.519,58.32 ; 186.53,58.32 186.53,57.07 206.52,57.07 206.52,58.32 ; 206.519,58.32 206.52,58.32 ; 113.48,57.07 133.47,57.07 133.47,58.32 113.48,58.32 113.48,57.07 ; 113.52,87.29 133.51,87.29 133.51,88.54 113.52,88.54 113.52,87.29 ; 150.05,87.29 170.04,87.29 170.04,88.46 169.959,88.54 150.05,88.54 150.05,88.54 150.05,87.29 ; 186.57,87.29 206.56,87.29 206.56,88.54 206.559,88.54 186.57,88.54 186.57,88.54 186.57,87.29 ; 223.06,57.07 243.05,57.07 243.05,58.32 243.049,58.32 223.06,58.32 223.06,57.07 ; 223.1,87.29 243.09,87.29 243.09,88.54 243.089,88.54 223.1,88.54 223.1,88.54 223.1,87.29

## Other copper
Top Layer:
  region net GND: 109.374,66.41 108.204,65.241 108.204,65.106 109.12,64.19 109.17,64.24 109.42,64.24
  region net GND: 121.95,76.46 121.2,75.71 121.2,75.32 121.763,75.32 122.053,75.03 122.193,75.17 123.14,75.17 123.14,76.14 123.26,76.26
  region net GND: 112.45,76.75 112.28,76.58 112.28,75.12 112.682,75.12 113.08,74.722 113.388,75.03 113.83,75.03 113.83,75.9 113.88,75.95
  region net GND: 107.13,79.23 107.2,79.16 107.2,77.84 107.233,77.84 108.083,76.99 108.59,77.497 108.59,78.72 108.54,78.77
  region net GND: 151.61,79.054 151.606,79.05 151.102,79.05 151.102,78.672 150.95,78.52 150.99,78.48 151.856,78.48
  region net GND: 150.428,58.959 150.992,58.959 151.212,59.18 151.51,59.18 151.51,59.9 151.06,60.35 150.02,60.35 149.58,59.91
  region net GND: 152.754,69.408 152.754,68.272 152.541,68.272 152.349,68.08 152.119,68.31 152.04,68.31 152.04,68.828 151.948,68.92 152.07,69.042 152.07,69.49
  region net GND: 142.64,77.8 144.84,77.8 144.89,77.85 144.84,77.9 144.84,78.815 143.425,78.815 143.11,79.13
  region net GND: 143.603,82.86 143.39,82.647 143.39,80.07 144.74,78.72 147.05,78.72 147.24,78.91 147.18,78.97 147.18,79.43 146.936,79.43 146.51,79.856 146.6,79.946 146.6,82.54
  region net GND: 143.778,89.801 146.289,89.801 146.55,89.54 146.41,89.4 146.41,87.45 143.57,87.45 143.39,87.27
  region net GND: 156.17,75.96 155.588,75.96 155.07,75.442 155.53,74.982 155.53,68.3 156.81,67.02 157.19,67.4 163.27,67.4 163.77,67.9 163.77,75.08
  region net GND: 138.37,89.99 138.37,87.14 138.77,86.74 140.34,86.74 140.64,87.04 140.64,89.99
  region net C: 138.05,66.52 138.06,66.53 140.19,66.53 140.6,66.12 140.6,63.76 140.45,63.61 138.2,63.61 138.07,63.74
  region net GND: 138.31,58.79 138.31,55.84 140.69,55.84 140.69,58.804
  region net NetC12_1: 106.65,58.89 106.65,56.63 107.04,56.24 108.41,56.24 108.75,56.58 108.75,58.89
  region net GND: 106.51,66.26 106.51,63.98 106.94,63.55 108.53,63.55 108.85,63.87 108.85,66.25
  region net GND: 106.57,82.96 106.57,79.25 106.8,79.02 108.77,79.02 109.03,79.28 109.03,81.4 107.56,82.87 107.56,82.97
  region: 106.48,81.93
  region net NetC11_2: 106.39,90.07 106.39,86.57 106.5,86.46 108.97,86.46 109.13,86.62 109.13,90.07
  region net GND: 146.18,83.77 146.19,83.76 150.18,83.76 150.18,83.04 149.8,82.66 149.46,83 146.92,83
  region net NetD1_1: 147.55,86.72 147.55,86.32 148.22,86.32 148.29,86.25 148.35,86.31 148.35,86.73 148.34,86.73 148.1,86.97
Bottom Layer:
  region net GND: 155.45,70.37 155.496,70.416 156.18,70.416 156.18,69.907 156.21,69.877 155.94,69.607 155.94,69.55
  region net GND: 151.81,70.08 151.21,69.48 151.21,68.47 152.31,68.47 153.57,67.21 154.35,67.99 154.35,69.84 154.38,69.87
  region net GND: 162.05,77.77 162.05,75.9 161.97,75.82 162.44,75.35 163.83,75.35 164.25,75.77 164.25,77.64 163.94,77.95
  region net GND: 153.85,75.88 153.91,75.82 156.31,75.82 157.04,75.09 157.04,74.5 156.62,74.08 153.89,74.08
  region net D: 139.41,82.47 138.58,81.64 138.58,80 138.87,79.71 140.33,79.71 140.6,79.98 140.6,82.47
  region net GND: 138.62,89.69 138.62,87.65 138.8,87.47 140.35,87.47 140.56,87.68 140.56,89.68
  region net C: 138.9,65.61 138.9,63.79 139.18,63.51 140.56,63.51 140.71,63.66 140.71,65.61
  region net GND: 138.86,58.14 138.85,58.13 138.85,56.23 139.1,55.98 140.52,55.98 140.66,56.12 140.66,58.14
  region net NetC12_1: 106.78,58.71 106.78,56.65 107,56.43 108.33,56.43 108.54,56.64 108.54,58.71
  region net GND: 106.55,66.26 106.55,64.28 106.77,64.06 108.36,64.06 108.53,64.23 108.53,66.26
  region net NetC11_2: 106.41,90.03 106.41,86.68 106.39,86.66 106.46,86.59 107.43,86.59 107.65,86.81 107.65,87.15 108.25,87.75 108.25,90.03
  region net GND: 106.35,81.78 106.35,79.95 106.5,79.8 107.37,79.8 107.53,79.96 107.53,81.78
  region net GND: 148.878,83.318 148.878,83.808 149.09,84.02 149.33,84.02 149.33,83.119 149.281,83.07

## Silkscreen, mask and mechanical layers (free items; w line width, h text height)
Top Overlay:
  text "Design by Tien Thinh" at 187.61,84.4 h2
  text "Hanoi 9/12/2019" at 190.92,82.03 h1.52
  text "Đo Lường Điện Tử" at 115.09,60.24 h2
Bottom Overlay:
  text "VBAT" at 181.7,62.91 h1.52 r90
  text "GND" at 184.3,61.74 h1.52 r90
  text "HeartBand" at 238.68,59.73 h3

## Text inside footprints (layer, text, board x,y; h text height)
U1: Top Overlay "www.EvertDekker.com" at 155.605,84.388 h0.5